# Altium PCB PCB1.PcbDoc
Units mm, origin at the board's own origin, x right, y up, seen from the top; angles counter-clockwise.
Board outline 115.32 x 91.31 mm, 2 copper layers (Top Layer, Bottom Layer); 45 components, 42 nets, 387 pads, 45 vias.
Unrouted connection lines stored in the file: 18.
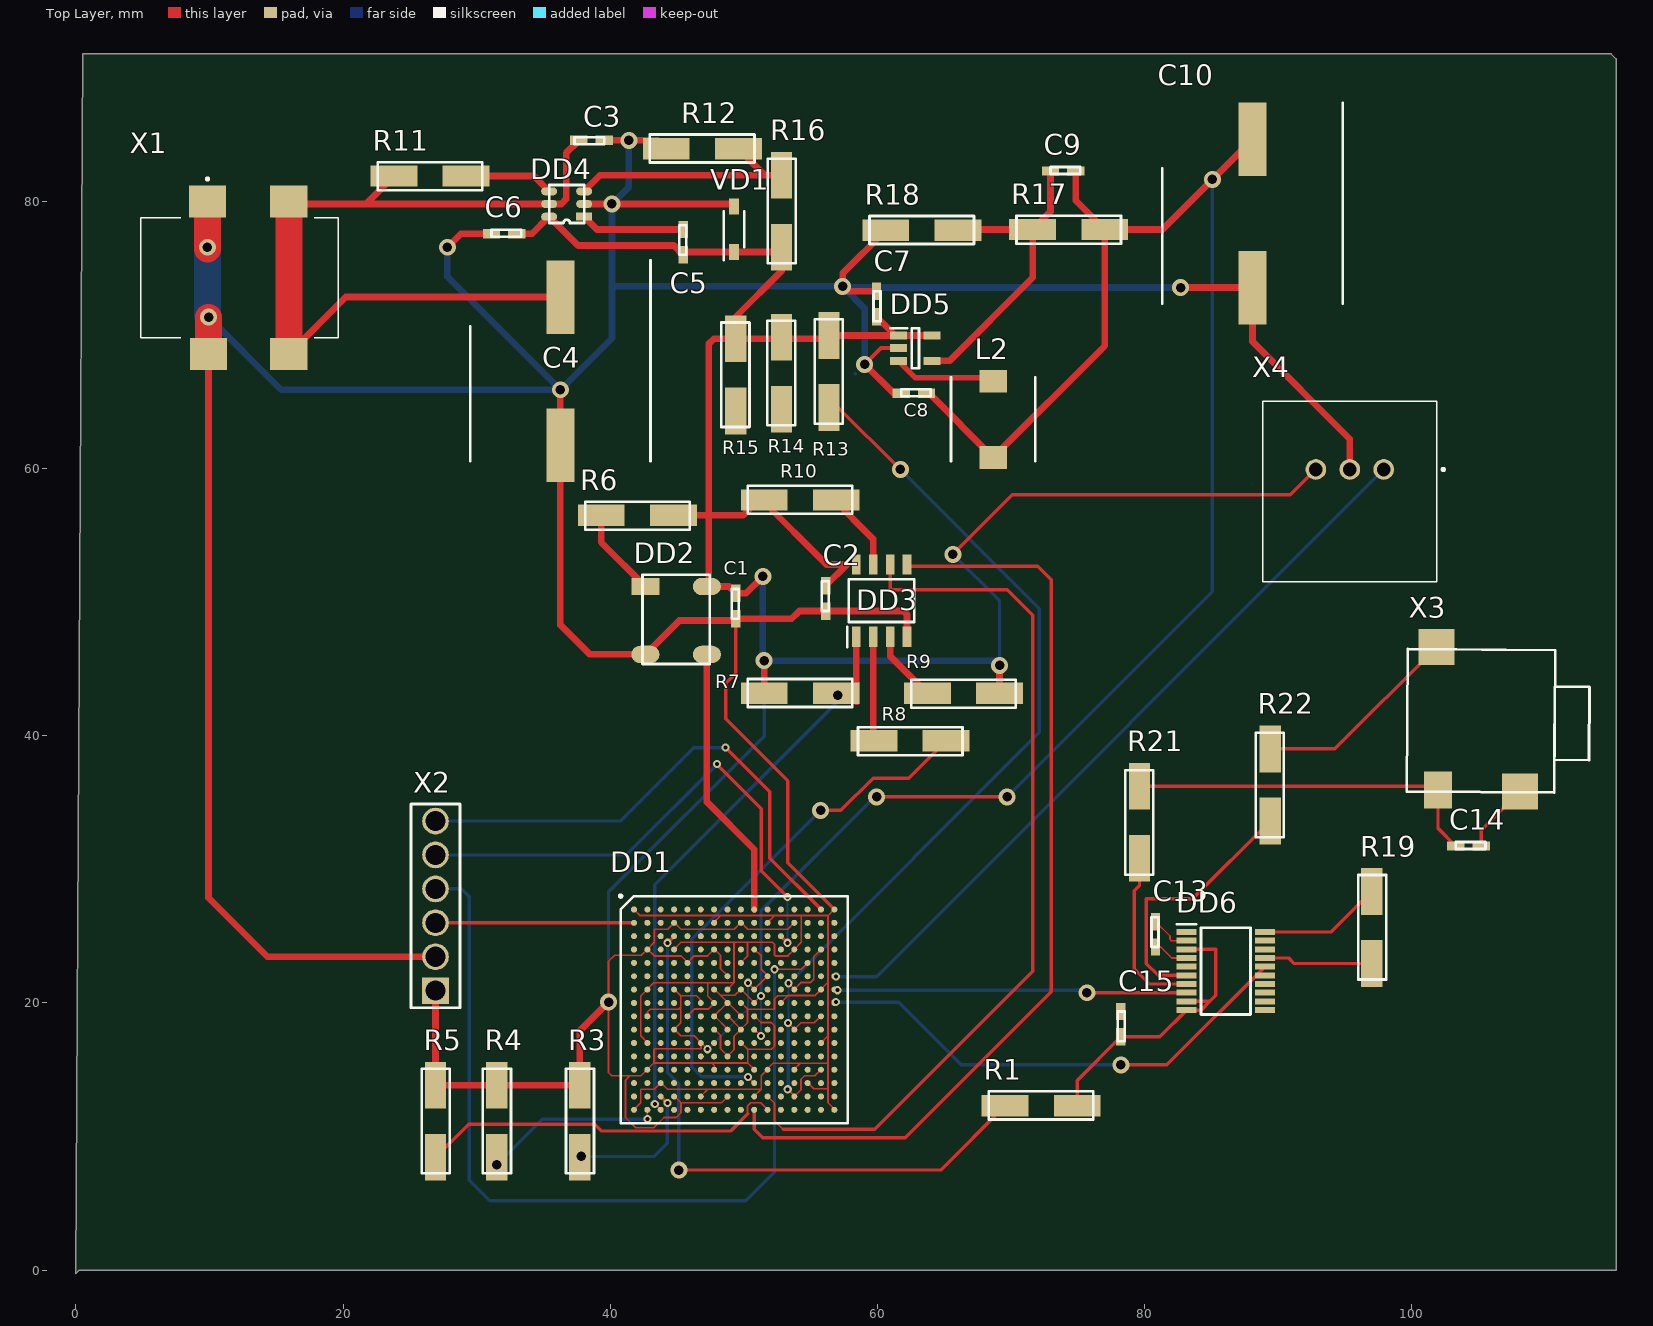
[diagram p0: Top Layer view]
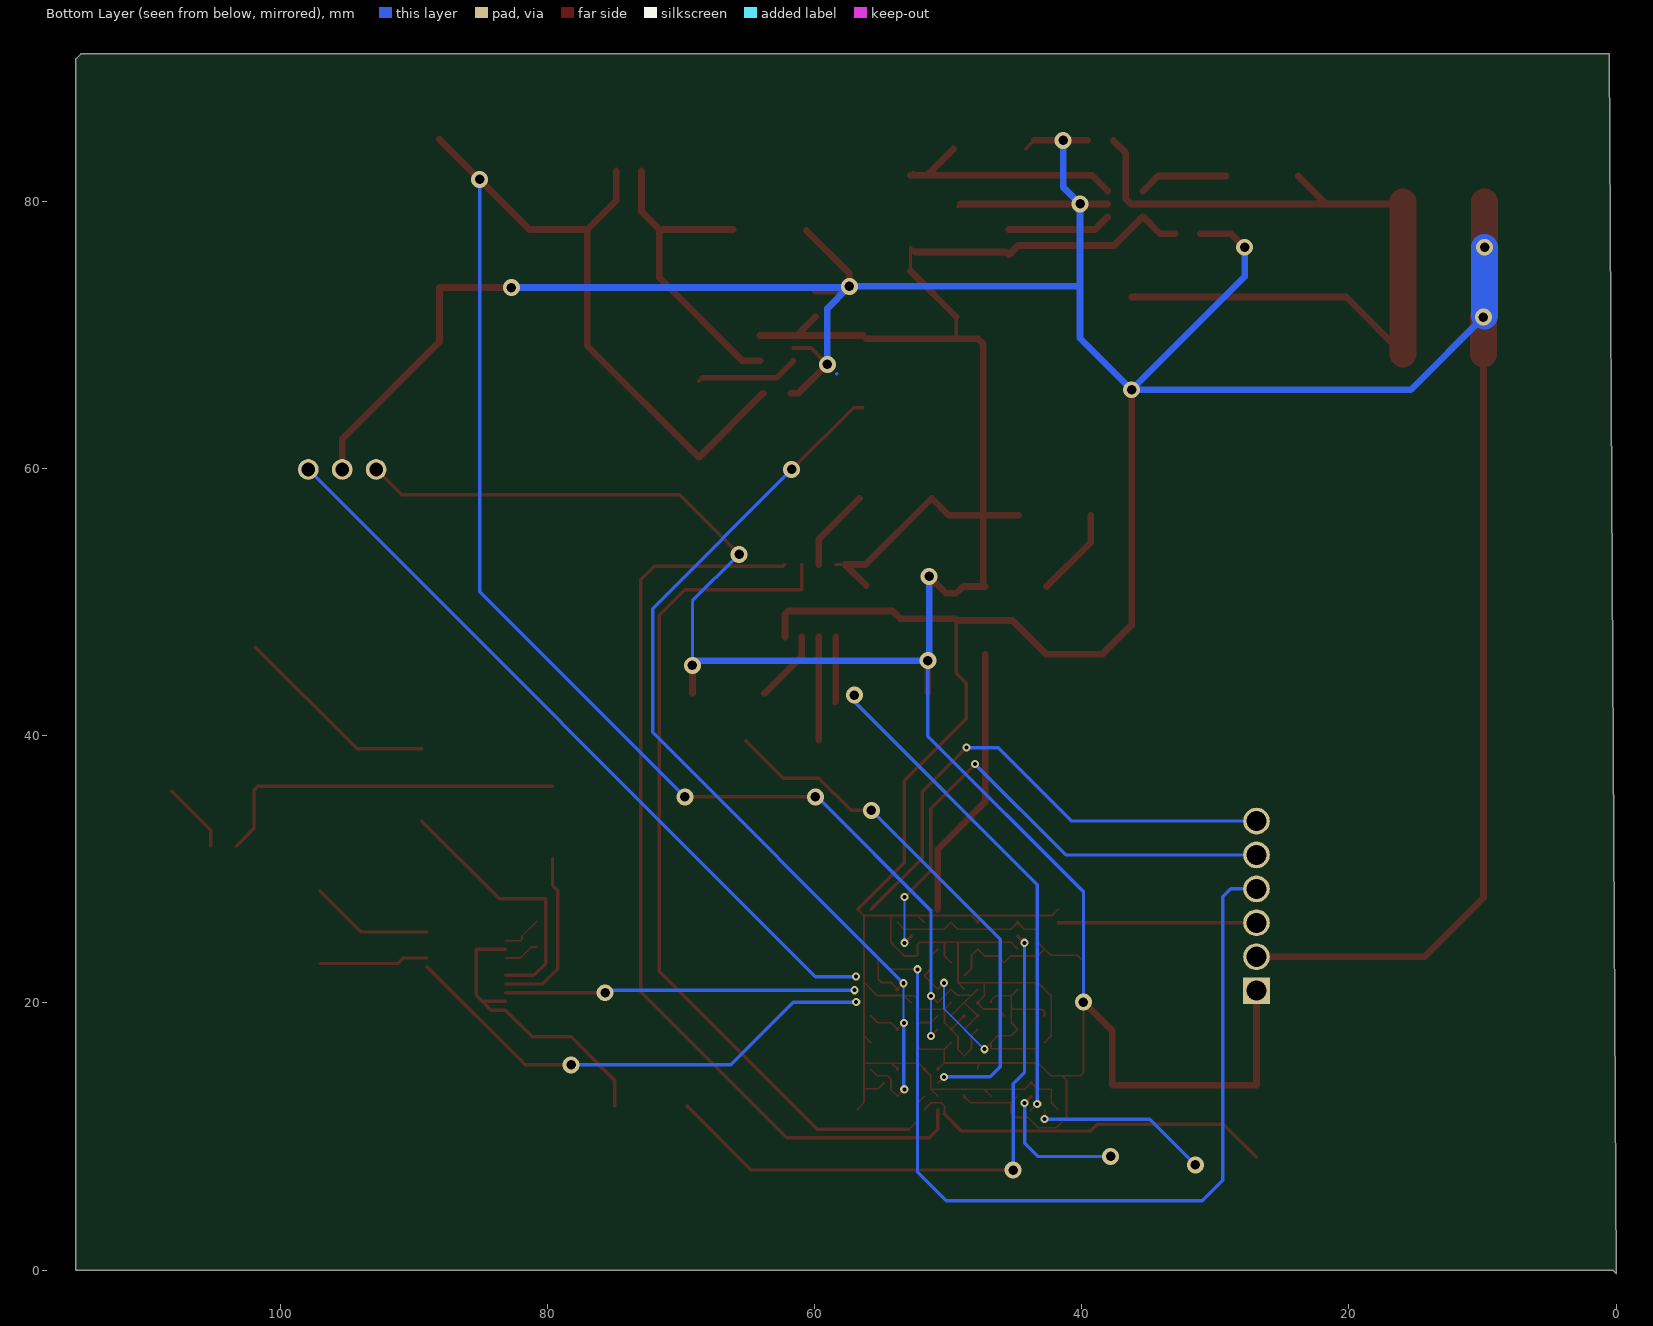
[diagram p1: Bottom Layer view, seen from below]

## Layer stack, top to bottom
Top Solder: solder mask 0.0102, Solder Resist, Dk 3.5
Top Layer: signal copper 0.0356
Dielectric 1: dielectric 0.32, FR-4, Dk 4.8
Bottom Layer: signal copper 0.0356
Bottom Solder: solder mask 0.0102, Solder Resist, Dk 3.5

## Board outline
0.508,91.059 114.935,91.059 115.316,90.678 115.316,0 0.254,0 0,-0.254

## Design rules (kind name [scope] priority, off if disabled: settings)
Clearance [All] p1 off: gap=0.254 ignorepadtopadclearanceinfootprint=FALSE except(0: Arc-Hole Track-Hole SMDPad-Hole THPad-Hole Via-Hole Fill-Hole Poly-Hole Region-Hole Text-Hole)
PolygonConnect [All] p1: connectstyle=Relief reliefconductorwidth=0.254 reliefentries=4 polygonreliefangle="90 Angle" airgapwidth=0.254
RoutingVias [All] p1: holewidth=0.711 width=1.27 viastyle="Through Hole" minholewidth=0.711 minwidth=1.27 maxholewidth=0.711 maxwidth=1.27
SolderMaskExpansion [All] p1: expansion=0.102
Width [All] p1: maxlimit=0.254 minlimit=0.254 preferedwidth=0.254
30 further rules are at their usual default settings.

## Components (designator, comment, footprint, x,y, rotation, side; value= is the part's Value field where it differs from the comment)
C1 "Capacitor" SMD0805 49.403,49.723 r270 top
C2 "Capacitor" SMD0805 56.134,50.292 r270 top
C3 "Capacitor" SMD0805 38.608,84.582 r0 top
C4 "SMD_ElectrolyticCap" ElectrolitycCap 36.322,67.183 r270 top
C5 "Capacitor" SMD0805 45.466,76.962 r270 top
C6 "Capacitor" SMD0805 32.07,77.597 r180 top
C7 "Capacitor" SMD0805 59.944,72.329 r90 top
C8 "Capacitor" SMD0805 62.738,65.659 r180 top
C9 "Capacitor" SMD0805 73.914,82.296 r180 top
C10 "SMD_ElectrolyticCap" ElectrolitycCap 88.138,78.994 r270 top
C13 "Capacitor" SMD0805 80.832,25.146 r270 top
C14 "Capacitor" SMD0805 104.267,31.75 r180 top
C15 "Capacitor" SMD0805 78.232,18.415 r90 top
DD1 "Spartan-6" FTG256 49.312,20.527 r0 top
DD2 "SG-8002JC-50" SOJ4 42.644,51.181 r0 top
DD3 "M25P80" STSO-8 63.118,46.35 r90 top
DD4 "MP2359" SOP6 38.053,78.872 r180 top
DD5 "NCP1529" "PCBComponent_1 - duplicate1" 60.935,70.534 r0 top
DD6 "PCM5102A" PW(R-PDSO-G20) 82.104,18.801 r0 top
L2 "Inductance" InductorSMD 65.276,67.656 r270 top
R1 "SMD_Resistor" Resistor 72.263,12.305 r0 top
R3 "SMD_Resistor" Resistor 37.719,11.143 r270 top
R4 "SMD_Resistor" Resistor 31.496,11.143 r270 top
R5 "SMD_Resistor" Resistor 26.924,11.143 r270 top
R6 "SMD_Resistor" Resistor 42.037,56.515 r180 top
R7 "SMD_Resistor" Resistor 54.229,43.18 r0 top
R8 "SMD_Resistor" Resistor 62.451,39.624 r180 top
R9 "SMD_Resistor" Resistor 66.454,43.18 r180 top
R10 "SMD_Resistor" Resistor 54.229,57.658 r0 top
R11 "SMD_Resistor" Resistor 26.51,81.915 r180 top
R12 "SMD_Resistor" Resistor 46.901,83.947 r0 top
R13 "SMD_Resistor" Resistor 56.388,67.277 r270 top
R14 "SMD_Resistor" Resistor 52.832,67.15 r270 top
R15 "SMD_Resistor" Resistor 49.403,67.023 r270 top
R16 "SMD_Resistor" Resistor 52.832,79.281 r270 top
R17 "SMD_Resistor" Resistor 74.328,77.912 r180 top
R18 "SMD_Resistor" Resistor 63.34,77.851 r0 top
R19 "SMD_Resistor" Resistor 97.028,25.654 r270 top
R21 "SMD_Resistor" Resistor 79.629,33.528 r90 top
R22 "SMD_Resistor" Resistor 89.408,36.322 r90 top
VD1 "1N5819HW" SOD123 50.939,75.367 r90 top
X1 "PowerJack3.5mm" PowerJackConnector4pin 3.835,66.37 r0 top
X2 "6x2.54Connector" 6PINConnector2.54 26.924,20.922 r180 top
X3 "CUI SJ1-3513-SMT-TR" StereoJack3.5 108.131,35.841 r180 top
X4 "TORX1355" SPDIF 87.905,50.46 r0 top

## Footprints (in the part's own frame and the unit in brackets; to place one, negate y for a bottom-side part, rotate by r counter-clockwise, add the part's x,y. Pads: shape width x height; smd on the part's side, far side on the other; paste and mask are expansions set on the pad)
6PINConnector2.54 [mm]
  rect 2x2 hole 1.5: 1(0,0)
  round 2 hole 1.5: 2(0,-2.54) 3(0,-5.08) 4(0,-7.62) 5(0,-10.16) 6(0,-12.7)
  silkscreen extent -1.84,-13.97 1.84,1.27
ElectrolitycCap [mm]
  rect 5.5x2.1 smd: 1(-5.669,-0.046) 2(5.431,-0.046)
  silkscreen extent -8.42,-6.8 6.63,6.7, body extent -7.62,-6.9 7.38,6.8, height 17
FTG256 [mm]
  round 0.45 smd: A1(-7.525,6.475) A2(-6.525,6.475) A3(-5.525,6.475) A4(-4.525,6.475) A5(-3.525,6.475) A6(-2.525,6.475) A7(-1.525,6.475) A8(-0.525,6.475) A9(0.475,6.475) A10(1.475,6.475) A11(2.475,6.475) A12(3.475,6.475) A13(4.475,6.475) A14(5.475,6.475) A15(6.475,6.475) A16(7.475,6.475) B1(-7.525,5.475) B2(-6.525,5.475) B3(-5.525,5.475) B4(-4.525,5.475) B5(-3.525,5.475) B6(-2.525,5.475) B7(-1.525,5.475) B8(-0.525,5.475) B9(0.475,5.475) B10(1.475,5.475) B11(2.475,5.475) B12(3.475,5.475) B13(4.475,5.475) B14(5.475,5.475) B15(6.475,5.475) B16(7.475,5.475) C1(-7.525,4.475) C2(-6.525,4.475) C3(-5.525,4.475) C4(-4.525,4.475) C5(-3.525,4.475) C6(-2.525,4.475) C7(-1.525,4.475) C8(-0.525,4.475) C9(0.475,4.475) C10(1.475,4.475) C11(2.475,4.475) C12(3.475,4.475) C13(4.475,4.475) C14(5.475,4.475) C15(6.475,4.475) C16(7.475,4.475) D1(-7.525,3.475) D2(-6.525,3.475) D3(-5.525,3.475) D4(-4.525,3.475) D5(-3.525,3.475) D6(-2.525,3.475) D7(-1.525,3.475) D8(-0.525,3.475) D9(0.475,3.475) D10(1.475,3.475) D11(2.475,3.475) D12(3.475,3.475) D13(4.475,3.475) D14(5.475,3.475) D15(6.475,3.475) D16(7.475,3.475) E1(-7.525,2.475) E2(-6.525,2.475) E3(-5.525,2.475) E4(-4.525,2.475) E5(-3.525,2.475) E6(-2.525,2.475) E7(-1.525,2.475) E8(-0.525,2.475) E9(0.475,2.475) E10(1.475,2.475) E11(2.475,2.475) E12(3.475,2.475) E13(4.475,2.475) E14(5.475,2.475) E15(6.475,2.475) E16(7.475,2.475) F1(-7.525,1.475) F2(-6.525,1.475) F3(-5.525,1.475) F4(-4.525,1.475) F5(-3.525,1.475) F6(-2.525,1.475) F7(-1.525,1.475) F8(-0.525,1.475) F9(0.475,1.475) F10(1.475,1.475) F11(2.475,1.475) F12(3.475,1.475) F13(4.475,1.475) F14(5.475,1.475) F15(6.475,1.475) F16(7.475,1.475) G1(-7.525,0.475) G2(-6.525,0.475) G3(-5.525,0.475) G4(-4.525,0.475) G5(-3.525,0.475) G6(-2.525,0.475) G7(-1.525,0.475) G8(-0.525,0.475) G9(0.475,0.475) G10(1.475,0.475) G11(2.475,0.475) G12(3.475,0.475) G13(4.475,0.475) G14(5.475,0.475) G15(6.475,0.475) G16(7.475,0.475) H1(-7.525,-0.525) H2(-6.525,-0.525) H3(-5.525,-0.525) H4(-4.525,-0.525) H5(-3.525,-0.525) H6(-2.525,-0.525) H7(-1.525,-0.525) H8(-0.525,-0.525) H9(0.475,-0.525) H10(1.475,-0.525) H11(2.475,-0.525) H12(3.475,-0.525) H13(4.475,-0.525) H14(5.475,-0.525) H15(6.475,-0.525) H16(7.475,-0.525) J1(-7.525,-1.525) J2(-6.525,-1.525) J3(-5.525,-1.525) J4(-4.525,-1.525) J5(-3.525,-1.525) J6(-2.525,-1.525) J7(-1.525,-1.525) J8(-0.525,-1.525) J9(0.475,-1.525) J10(1.475,-1.525) J11(2.475,-1.525) J12(3.475,-1.525) J13(4.475,-1.525) J14(5.475,-1.525) J15(6.475,-1.525) J16(7.475,-1.525) K1(-7.525,-2.525) K2(-6.525,-2.525) K3(-5.525,-2.525) K4(-4.525,-2.525) K5(-3.525,-2.525) K6(-2.525,-2.525) K7(-1.525,-2.525) K8(-0.525,-2.525) K9(0.475,-2.525) K10(1.475,-2.525) K11(2.475,-2.525) K12(3.475,-2.525) K13(4.475,-2.525) K14(5.475,-2.525) K15(6.475,-2.525) K16(7.475,-2.525) L1(-7.525,-3.525) L2(-6.525,-3.525) L3(-5.525,-3.525) L4(-4.525,-3.525) L5(-3.525,-3.525) L6(-2.525,-3.525) L7(-1.525,-3.525) L8(-0.525,-3.525) L9(0.475,-3.525) L10(1.475,-3.525) L11(2.475,-3.525) L12(3.475,-3.525) L13(4.475,-3.525) L14(5.475,-3.525) L15(6.475,-3.525) L16(7.475,-3.525) M1(-7.525,-4.525) M2(-6.525,-4.525) M3(-5.525,-4.525) M4(-4.525,-4.525) M5(-3.525,-4.525) M6(-2.525,-4.525) M7(-1.525,-4.525) M8(-0.525,-4.525) M9(0.475,-4.525) M10(1.475,-4.525) M11(2.475,-4.525) M12(3.475,-4.525) M13(4.475,-4.525) M14(5.475,-4.525) M15(6.475,-4.525) M16(7.475,-4.525) N1(-7.525,-5.525) N2(-6.525,-5.525) N3(-5.525,-5.525) N4(-4.525,-5.525) N5(-3.525,-5.525) N6(-2.525,-5.525) N7(-1.525,-5.525) N8(-0.525,-5.525) N9(0.475,-5.525) N10(1.475,-5.525) N11(2.475,-5.525) N12(3.475,-5.525) N13(4.475,-5.525) N14(5.475,-5.525) N15(6.475,-5.525) N16(7.475,-5.525) P1(-7.525,-6.525) P2(-6.525,-6.525) P3(-5.525,-6.525) P4(-4.525,-6.525) P5(-3.525,-6.525) P6(-2.525,-6.525) P7(-1.525,-6.525) P8(-0.525,-6.525) P9(0.475,-6.525) P10(1.475,-6.525) P11(2.475,-6.525) P12(3.475,-6.525) P13(4.475,-6.525) P14(5.475,-6.525) P15(6.475,-6.525) P16(7.475,-6.525) R1(-7.525,-7.525) R2(-6.525,-7.525) R3(-5.525,-7.525) R4(-4.525,-7.525) R5(-3.525,-7.525) R6(-2.525,-7.525) R7(-1.525,-7.525) R8(-0.525,-7.525) R9(0.475,-7.525) R10(1.475,-7.525) R11(2.475,-7.525) R12(3.475,-7.525) R13(4.475,-7.525) R14(5.475,-7.525) R15(6.475,-7.525) R16(7.475,-7.525) T1(-7.525,-8.525) T2(-6.525,-8.525) T3(-5.525,-8.525) T4(-4.525,-8.525) T5(-3.525,-8.525) T6(-2.525,-8.525) T7(-1.525,-8.525) T8(-0.525,-8.525) T9(0.475,-8.525) T10(1.475,-8.525) T11(2.475,-8.525) T12(3.475,-8.525) T13(4.475,-8.525) T14(5.475,-8.525) T15(6.475,-8.525) T16(7.475,-8.525)
  silkscreen extent -8.62,-9.53 8.47,7.57, body extent -8.53,-9.53 8.47,7.47, height 1.55
InductorSMD [mm] "B82462G4472M"
  rect 1.7x2.05 smd: 1(1.108,3.398) 2(6.808,3.398)
  silkscreen extent 0.81,0.25 7.11,6.55, body extent 0.81,0.25 7.11,6.55, height 3
"PCBComponent_1 - duplicate1" [mm]
  rect 1.25x0.6 smd: 1(0.66,-0.557) 2(0.66,-1.507) 3(0.66,-2.457) 4(3.16,-2.457) 5(3.16,-0.557)
  silkscreen extent 0.04,-3.01 2.19,-0.01, body extent 0.54,-3.01 3.29,-0.01, height 1.1
PowerJackConnector4pin [mm]
  rect 2.8x2.4 smd: 1(6.016,13.625) 2(6.096,2.225) 3(12.116,2.225) 4(12.116,13.625)
  round 0.85 on Mech1: 5(6.016,7.925)
  round 0.95 on Mech1: 6(10.516,7.925)
  silkscreen extent 1.02,3.43 15.82,15.42, body extent 1.02,1.27 15.82,14.59, height 11.1
PW(R-PDSO-G20) [mm]
  rect 1.475x0.45 smd: 1(1.047,6.517) 2(1.047,5.867) 3(1.047,5.217) 4(1.047,4.567) 5(1.047,3.917) 6(1.047,3.267) 7(1.047,2.617) 8(1.047,1.967) 9(1.047,1.317) 10(1.047,0.667) 11(6.923,0.667) 12(6.923,1.317) 13(6.923,1.967) 14(6.923,2.617) 15(6.923,3.267) 16(6.923,3.917) 17(6.923,4.567) 18(6.923,5.217) 19(6.923,5.867) 20(6.923,6.517)
  silkscreen extent 0.31,0.34 5.83,7.09, body extent 0.78,0.34 7.19,6.84, height 1.2
Resistor [mm] "SMD2512"
  rect 3.5x1.6 smd: 1(-2.7,0) 2(2.7,0)
  silkscreen extent -3.93,-1.02 3.9,1.07
SMD0805 [mm]
  rect 1.3x0.7 smd: 1(-0.95,0) 2(0.95,0)
  silkscreen extent -1.27,-0.3 0.95,0.23
SOD123 [mm]
  rect 1.2x0.75 smd: 1(0.862,1.663) 2(4.262,1.663)
  silkscreen extent 0.26,0.89 3.91,2.44, body extent 0.71,0.89 4.41,2.44, height 1.45
SOJ4 [mm]
  rect 2.1x1.3 smd: 1(0,0)
  oval 2.1x1.3 smd: 2(0,-5.08) 3(4.6,-5.08) 4(4.6,0)
  silkscreen extent -0.23,-5.8 4.82,0.87
SOP6 [mm]
  rect 1.2x0.6 smd: 1(0,0)
  oval 1.2x0.6 smd: 2(0,-0.95) 3(0,-1.9) 4(2.62,-1.9) 5(2.62,-0.95) 6(2.62,0)
  silkscreen extent 0,-2.38 2.62,0.48
SPDIF [mm]
  round 1.545 hole 1.03: 1(10.012,9.484) 2(7.472,9.484) 3(4.932,9.484)
  silkscreen extent 0.97,1.08 14.57,14.58, body extent 0.97,1.08 13.97,14.58, height 8
StereoJack3.5 [mm]
  rect 2.7x2.7 smd: 1(0,0) 2(6.25,-10.8)
  rect 2.1x2.75 smd: 3(6.15,-0.1)
  silkscreen extent -5.2,-10.66 8.5,0.09
STSO-8 [mm]
  rect 1.525x0.65 smd: 1(1.058,4.698) 2(1.058,3.428) 3(1.058,2.158) 4(1.058,0.888) 5(6.482,0.888) 6(6.482,2.158) 7(6.482,3.428) 8(6.482,4.698)
  silkscreen extent 0.29,0.34 5.37,5.37, body extent 0.77,0.34 6.77,5.24, height 1.75

## Part data
C1 C2 C3 C5 C6 C7 C8 C9 C13 C14 C15: library part SMD_Cap, "C1825C104JBGACTU - Kemet"
C4 C10: "EEV-EB2W4R7SQ"
DD1: library part XC6SLX16-2FTG256C
DD2: "Oscillator 50 MHz 3.3V smd"
DD3: "Flash memory SPI"
DD4: "step-down switch converter TSOT-23-6"
DD5: "Step-down / Converter TSOP?5"
DD6: "I2S DAC"
R1 R3 R4 R5 R6 R7 R8 R9 R10 R11 R12 R13 R14 R15 R16 R17 R18 R19 R21 R22: "SMD resistor"
VD1: "Didode Schottky"
X2: "JTAG connect on PCB"
X3: "Stereo Jack 3.5 CUI SJ1-3513-SMT-TR"

## Via types
v1: diameter 1.27, hole 0.711, Top Layer to Bottom Layer, 25 vias
v2: diameter 0.61, hole 0.3, Top Layer to Bottom Layer, 19 vias
v3: diameter 0.6, hole 0.3, Top Layer to Bottom Layer, 1 vias

## Nets (pads, with @x,y where several pads share a name; then routed paths per layer and width w, separated by ;. In a path a pad name is that pad's centre, name@x,y a point inside that pad or via, vN(x,y) a via of type N, cw(c..) or ccw(c..) an arc to the next point about the centre after c; other vN are vias at no path point)
1V2: C8.1 C9.1 C10.1 DD1.G7 DD1.G9 DD1.H8 DD1.H10 DD1.J7 DD1.J9 DD1.K8 DD1.K10 L2.2 R17.1 | length 140.6
  Top Layer w0.13: DD1.G7@47.799,21.034 48.259,20.574 ; DD1.K8@48.799,18.034 47.809,19.024 47.799,19.034 DD1.H8@48.799,20.034 ; DD1.J9@49.799,19.034 DD1.H8@48.799,20.034 ; DD1.K10@50.799,18.034 v2(51.294,17.539) ; v2(51.294,20.529) 50.799,20.034 49.799,21.034 49.339,20.574 48.259,20.574 ; 48.259,20.574 DD1.H8@48.799,20.034
  Top Layer w0.254: v1(59.944,35.433) v1(69.723,35.433) ; C8.1 C8.1@63.863,65.659
  Top Layer w0.5: C8.1@63.863,65.659 L2.2 77.028,69.202 R17.1 ; C9.1 74.864,80.076 R17.1 ; C10.1 81.341,77.912 R17.1
  Bottom Layer w0.13: v2(51.294,17.539) v2(51.294,20.529)
  Bottom Layer w0.254: v2(51.294,20.529) 51.294,26.91 v1@59.817,35.433 ; v1(69.723,35.433) 85.09,50.8 v1(85.09,81.661)
3V3: C1.1 C2.1 C5.2 C6.1 C7.1 DD1.B4 DD1.B9 DD1.B13 DD1.D2 DD1.D7 DD1.D10 DD1.E5 DD1.F8 DD1.F11 DD1.G4 DD1.G10 DD1.H6 DD1.J2 DD1.J10 DD1.K4 DD1.L6 DD1.L9 DD1.N2 DD1.N7 DD1.N10 DD1.R4 DD1.R8 DD2.4 DD3.8 DD4.6 DD5.1 DD5.5 DD6.1 DD6.8 DD6.20 R3.1 R4.1 R5.1 R6.1 R7.1 R9.1 R10.1 R13.1 R14.1 R15.1 R16.2 R19.1 VD1.1 X2.1 X4.3 | length 342.6
  Top Layer w0.13: DD1.J2@42.799,19.034 42.799,19.333 43.007,19.541 45.146,19.541 45.29,19.685 ; DD1.R4@44.799,13.034 45.308,12.525 ; DD1.G4@44.799,21.034 45.29,20.543 ; DD1.B4@44.799,26.003 44.323,25.527 43.307,25.527 43.307,24.542 DD1.D2@42.799,24.034 ; DD1.B4@44.799,26.034 45.306,25.527 49.292,25.527 49.799,26.034 50.306,25.527 53.292,25.527 DD1.B13@53.799,26.034 ; DD1.H6@46.799,20.034 46.799,20.209 46.465,20.543 45.29,20.543 ; v2(47.294,16.539) DD1.L6@46.799,17.034 ; DD1.N7@47.799,15.034 47.799,15.32 47.608,15.511 ; DD1.R8@48.799,12.985 48.339,12.525 45.308,12.525 ; DD1.F8@48.799,22.034 48.26,22.573 48.26,23.573 47.799,24.034 47.292,23.527 46.292,23.527 45.799,23.034 45.306,23.527 43.306,23.527 DD1.D2@42.799,24.034 ; DD1.L9@49.799,17.034 50.306,16.527 ; v2(50.322,21.511) 50.799,21.034 51.799,22.034 51.308,22.525 51.308,23.525 DD1.D10@50.799,24.034 ; DD1.N10@50.783,15.034 50.306,15.511 ; DD1.J10@50.799,19.034 51.291,18.542 52.07,18.542 52.308,18.304 52.308,16.764 52.071,16.527 50.306,16.527 ; 41.467,14.543 40.132,14.543 39.878,14.797 v1(39.878,20.066) 39.878,23.114 40.337,23.573 42.338,23.573 DD1.D2@42.799,24.034 ; 41.467,14.543 41.148,14.224 41.148,11.43 41.91,10.668 43.274,10.668 44.036,11.43 44.958,11.43 45.308,11.78 45.308,12.525 ; 41.467,14.543 42.308,14.543 43.276,15.511 ; 43.276,15.511 47.608,15.511 ; 43.276,15.511 43.276,16.511 43.338,16.573 46.799,16.573 DD1.L6@46.799,17.034 ; 45.29,19.685 45.29,20.543 ; 45.29,19.685 45.29,18.525 44.799,18.034 45.29,17.543 46.29,17.543 DD1.L6@46.799,17.034 ; 47.608,15.511 50.306,15.511 ; 50.306,15.511 50.306,16.527
  Top Layer w0.254: DD1.B4@44.799,26.003 DD1.B4@44.799,26.034 ; C5.2 C5.2@45.683,76.229 ; DD2.4 DD2.4@47.371,51.308 ; DD1.R8@48.799,12.985 DD1.R8@48.799,13.034 ; R15.1 R15.1@49.403,71.374 ; DD1.N10@50.783,15.034 DD1.N10@50.799,15.034 ; R16.2@52.48,76.229 R16.2 52.832,74.803 ; R13.1@56.134,69.723 R13.1 ; 57.724,52.832 DD3.8 ; DD5.1@61.346,69.977 DD5.1 ; v1(65.659,53.594) 70.104,58.039 90.932,58.039 X4.3 ; v1(75.692,20.768) DD6.8 ; DD6.20 93.992,25.318 R19.1
  Top Layer w0.5: X2.1 R5.1 R4.1 R3.1 37.719,17.907 v1(39.878,20.066) ; C6.1 34.158,77.597 DD4.6 37.597,76.708 44.77,76.708 C5.2 ; R6.1 47.371,56.515 ; C5.2@45.683,76.229 VD1.1 R16.2@52.48,76.229 ; DD2.4 48.895,51.181 C1.1 50.165,50.673 v1(51.435,51.943) ; DD2.4@47.371,51.308 47.371,56.515 ; R15.1@49.403,71.374 52.832,74.803 ; R7.1 v1(51.529,45.626) ; C2.1 57.724,52.832 56.195,52.832 51.242,57.785 49.972,56.515 47.371,56.515 ; R13.1@56.134,69.723 R15.1 47.752,69.723 47.371,69.342 47.371,56.515 ; R13.1 61.346,69.977 C7.1 ; DD5.1 DD5.5 ; R9.1 v1(69.154,45.273)
  Bottom Layer w0.13: v2(47.294,16.539) 50.322,19.567 v2(50.322,21.511)
  Bottom Layer w0.254: v1(39.878,20.066) 39.878,28.321 51.529,39.972 v1(51.529,45.626) v1@51.435,45.72 ; v2(57.023,20.955) 75.505,20.955 v1(75.692,20.768) ; v1(65.659,53.594) 69.154,50.099 v1(69.154,45.273) v1@68.801,45.626
  Bottom Layer w0.5: v1@51.435,45.72 v1(51.435,51.943) ; v1(51.529,45.626) v1@68.801,45.626
GND: C1.2 C2.2 C3.2 C4.2 C6.2 C7.2 C8.2 C10.2 C14.1 C15.1 DD1.A1 DD1.A16 DD1.B7 DD1.B11 DD1.D4 DD1.D13 DD1.E9 DD1.G2 DD1.G8 DD1.G15 DD1.H7 DD1.H9 DD1.H12 DD1.J5 DD1.J8 DD1.K7 DD1.K9 DD1.L2 DD1.L15 DD1.M8 DD1.N11 DD1.N13 DD1.P3 DD1.P14 DD1.R6 DD1.R10 DD1.T1 DD1.T16 DD2.2 DD3.4 DD4.2 DD5.2 DD6.3 DD6.9 DD6.10 DD6.11 DD6.16 DD6.19 R1.2 R12.1 R18.1 VD1.2 X1.1 X1.2 X2.2 X3.1 X4.2 | length 482.1
  Top Layer w0.13: DD1.A1 42.246,26.543 48.26,26.543 ; DD1.T1@41.799,12.034 42.291,12.526 42.291,13.543 43.307,13.543 43.798,14.034 44.29,13.543 47.308,13.543 ; DD1.L2@42.799,17.034 42.291,17.542 42.291,20.526 43.276,21.511 47.306,21.511 ; DD1.D4@44.799,24.034 45.308,24.543 49.276,24.543 ; DD1.J5@45.799,19.034 46.323,19.558 47.371,19.558 DD1.H7@47.799,19.986 ; DD1.R6@46.799,13.034 47.308,13.543 ; DD1.K7@47.799,18.034 48.26,17.573 48.26,16.573 48.799,16.034 49.276,16.511 49.276,17.511 49.799,18.034 DD1.J8@48.799,19.034 ; DD1.H7@47.799,20.034 47.306,20.527 47.306,21.511 ; DD1.B7@47.799,26.082 48.26,26.543 ; DD1.G8@48.799,21.034 49.276,21.511 ; DD1.K9@49.799,18.049 50.292,18.542 50.292,19.541 ; DD1.H9@49.799,20.034 50.292,19.541 ; DD1.E9@49.799,23.034 50.292,23.527 50.292,24.543 ; DD1.R10@50.799,13.034 51.308,13.543 ; DD1.N11@51.799,15.034 51.308,14.543 51.308,13.543 ; DD1.N11@51.799,15.096 52.197,15.494 54.229,15.494 ; DD1.B11@51.799,26.034 52.308,26.543 ; DD1.H12@52.799,20.034 53.292,20.527 ; 53.292,20.555 52.542,20.548 52.308,20.314 52.308,19.541 50.292,19.541 ; 53.32,20.555 55.32,20.555 56.308,21.543 ; DD1.D13 53.31,23.525 52.372,23.525 52.308,23.589 52.308,24.384 52.149,24.543 50.292,24.543 ; DD1.N13@53.799,15.064 54.229,15.494 ; DD1.D13@53.799,24.034 54.308,24.543 54.308,26.543 ; DD1.P14@54.799,14.034 55.244,13.589 56.308,13.589 ; DD1.L15@55.799,17.034 56.308,17.543 ; DD1.A16@56.777,27.012 56.308,26.543 ; DD1.T16@56.799,12.034 56.308,12.525 56.308,13.589 ; 47.306,21.511 49.276,21.511 ; 47.308,13.543 51.308,13.543 ; 48.26,26.543 52.308,26.543 ; 49.276,21.511 49.276,24.543 ; 49.276,24.543 50.292,24.543 ; 52.308,26.543 54.308,26.543 ; 54.229,15.494 56.308,15.494 ; 54.308,26.543 56.308,26.543 ; 56.308,13.589 56.308,15.494 ; 56.308,15.494 56.308,17.543 ; 56.308,17.543 56.308,21.543 ; 56.308,21.543 56.308,26.543
  Top Layer w0.254: R12.1@43.566,84.582 R12.1 ; DD1.H7@47.799,19.986 DD1.H7@47.799,20.034 ; DD1.B7@47.799,26.034 DD1.B7@47.799,26.082 ; VD1.2@49.083,79.822 VD1.2 ; C1.2@49.271,48.641 C1.2 49.403,44.704 48.641,43.942 48.641,41.275 53.292,36.624 53.292,30.497 56.777,27.012 DD1.A16 ; DD1.K9@49.799,18.034 DD1.K9@49.799,18.049 ; DD1.N11@51.799,15.034 DD1.N11@51.799,15.096 ; DD1.N13@53.799,15.034 DD1.N13@53.799,15.064 ; v1(57.404,73.66) v1@57.785,73.279 ; R1.2 74.963,14.196 C15.1 81.148,17.465 DD6.10 84.238,19.468 84.888,20.118 ; v1(78.232,15.367) 81.676,15.367 DD6.16 ; DD6.9 84.888,20.118 ; DD6.3 85.344,24.018 85.344,20.574 84.888,20.118 ; C14.1 105.217,32.927 X3.1
  Top Layer w0.3: v1(59.055,67.818) 60.264,69.027 DD5.2
  Top Layer w0.5: X1.2 9.931,27.882 14.351,23.462 X2.2 ; v1(27.813,76.581) 28.829,77.597 C6.2 ; v1(36.276,65.913) C4.2 36.276,48.306 38.481,46.101 DD2.2 45.184,48.641 C1.2@49.271,48.641 ; DD4.2 v1(40.132,79.822) VD1.2@49.083,79.822 ; C3.2 v1(41.402,84.582) R12.1@43.566,84.582 ; C1.2 53.594,48.773 54.163,49.342 C2.2 61.976,49.342 62.23,49.088 DD3.4 ; v1(57.404,73.66) 57.404,74.615 R18.1 ; v1@57.785,73.279 C7.2 ; v1(59.055,67.818) 61.214,65.659 C8.2 ; v1(82.707,73.563) C10.2 88.092,69.515 95.377,62.23 X4.2
  Top Layer w2: v1@9.851,76.454 v1(9.851,76.581) X1.1 ; X1.2 v1(9.931,71.349)
  Bottom Layer w0.254: v1@9.851,71.429 v1(9.931,71.349) ; v2(56.896,20.066) 61.595,20.066 66.294,15.367 v1(78.232,15.367) ; v1(57.404,73.66) v1@57.501,73.563
  Bottom Layer w0.5: v1(9.931,71.349) 15.367,65.913 v1(36.276,65.913) ; v1(27.813,76.581) 27.813,74.376 v1(36.276,65.913) ; v1(41.402,84.582) 41.402,81.092 v1(40.132,79.822) 40.132,73.66 ; v1(57.404,73.66) 40.132,73.66 ; v1(59.055,67.818) 59.055,72.009 57.501,73.563 v1(82.707,73.563) ; v1(36.276,65.913) 40.132,69.769 40.132,73.66
  Bottom Layer w2: v1@9.851,71.429 v1(9.851,76.581)
NetC3_1: C3.1 C4.1 DD4.5 R11.2 X1.3 X1.4 | length 62.5
  Top Layer w0.254: 21.463,79.822 21.717,79.822
  Top Layer w0.5: X1.3 20.208,72.852 C4.1 ; X1.4 16.124,79.822 23.749,79.822 DD4.5 36.337,79.822 36.703,80.188 36.703,81.468 36.703,83.627 C3.1 ; 21.717,79.822 R11.2
  Top Layer w2: X1.3 X1.4
NetC5_1: C5.1 DD4.1 | length 7.8
  Top Layer w0.5: DD4.1 39.013,77.912 C5.1
NetC9_2: C9.2 DD5.4 R17.2 R18.2 | length 24.3
  Top Layer w0.254: R18.2 R18.2@66.101,77.912
  Top Layer w0.5: DD5.4 65.41,68.077 71.628,74.295 R17.2 ; R18.2@66.101,77.912 R17.2 ; C9.2 72.964,79.248 R17.2
NetC11_2: DD6.18
NetC12_2: DD6.5
NetC13_1: C13.1 DD6.2 | length 3.1
  Top Layer w0.13: C13.1 81.915,25.013 81.915,24.765 82.012,24.668 DD6.2
NetC13_2: C13.2 DD6.4 | length 2.7
  Top Layer w0.13: C13.2 81.214,24.196 82.042,23.368 DD6.4
NetC14_2: C14.2 R21.2 X3.3 | length 27.2
  Top Layer w0.254: R21.2 101.694,36.228 X3.3 101.981,33.086 C14.2
NetC15_2: C15.2 R22.2 X3.2 | length 15.6
  Top Layer w0.254: R22.2 94.262,39.022 X3.2
NetDD1_A4: DD1.A4 X4.1 | length 56.7
  Bottom Layer w0.254: v3(56.896,21.971) 59.944,21.971 X4.1
NetDD1_A10: DD1.A10 DD2.3 | length 20.6
  Top Layer w0.5: DD2.3 47.244,35.035 50.787,31.492 DD1.A10
NetDD1_A15: DD1.A15 X2.6 | length 39.1
  Top Layer w0.254: v2(48.641,39.116) 51.943,35.814 51.943,30.846 DD1.A15
  Bottom Layer w0.254: X2.6 40.767,33.622 46.261,39.116 v2(48.641,39.116)
NetDD1_B16: DD1.B16 DD6.15
NetDD1_C4: DD1.C4 R1.1 | length 44.5
  Top Layer w0.254: v2@44.282,24.507 v2(44.292,24.507) DD1.C4 ; v1(45.146,7.493) 64.751,7.493 R1.1
  Bottom Layer w0.254: v2(44.292,24.507) 44.292,14.824 45.146,13.97 v1(45.146,7.493)
NetDD1_C12: DD1.C12 X2.5 | length 40.1
  Top Layer w0.254: v2@48.006,37.846 51.308,34.544 51.308,29.904 v2(53.282,27.93) ; DD1.C12 v2(53.282,24.507)
  Bottom Layer w0.13: v2(53.282,24.507) v2(53.282,27.93)
  Bottom Layer w0.254: X2.5 41.194,31.082 v2(48.006,37.894)
NetDD1_C14: DD1.C14 X2.3 | length 14.9
  Top Layer w0.254: X2.3 41.787,26.002
NetDD1_D14: DD1.D14 DD6.12
NetDD1_E14: DD1.E14 X2.4 | length 66.2
  Top Layer w0.13: v2(52.308,22.525) 54.31,22.525 DD1.E14
  Bottom Layer w0.254: X2.4 28.862,28.542 29.464,27.94 29.464,6.731 30.988,5.207 50.165,5.207 52.308,7.35 v2(52.308,22.525)
NetDD1_F12: DD1.F12 DD6.14
NetDD1_G11: DD1.G11 DD6.13
NetDD1_P10: DD1.P10 R8.1 | length 39.9
  Top Layer w0.13: v2(50.322,14.467) DD1.P10
  Top Layer w0.254: v1(55.753,34.417) 57.277,34.417 59.69,36.83 62.357,36.83 R8.1
  Bottom Layer w0.254: v2(50.322,14.467) 46.874,14.467 46.101,15.24 46.101,24.765 v1(55.753,34.417)
NetDD1_P13: DD1.P13
NetDD1_R3: DD1.R3 R3.2 | length 10.6
  Top Layer w0.254: DD1.R3 v2(44.282,12.507)
  Bottom Layer w0.254: v1(37.846,8.509) 43.307,8.509 44.282,9.484 v2(44.282,12.507)
NetDD1_R11: DD1.R11 DD3.6 | length 66.5
  Top Layer w0.13: DD1.R11 52.308,12.481 52.308,11.176 52.943,10.541
  Top Layer w0.254: 52.943,10.541 59.804,10.541 71.628,22.365 71.628,49.022 69.723,50.927 60.96,50.927 DD3.6
NetDD1_T2: DD1.T2 R4.2 | length 13.4
  Top Layer w0.13: v2(42.787,11.303) DD1.T2
  Bottom Layer w0.254: v1(31.496,7.874) 34.925,11.303 v2(42.787,11.303)
NetDD1_T3: DD1.T3 DD3.1 R7.2 | length 42
  Top Layer w0.13: v2(43.34,12.448) DD1.T3 DD1.T3@43.838,11.951
  Top Layer w0.254: R7.2@58.42,42.578 R7.2@58.547,42.451
  Top Layer w0.5: R7.2@58.42,42.578 DD3.1
  Bottom Layer w0.254: v2(43.34,12.448) 43.34,28.862 57.023,42.545 v1(57.023,43.053)
NetDD1_T10: DD1.T10 DD3.5 | length 70.6
  Top Layer w0.254: DD1.T10 50.787,10.554 51.435,9.906 62.103,9.906 73.025,20.828 73.025,51.689 72.009,52.705 62.357,52.705 DD3.5
NetDD1_T11: DD1.T11 R5.2 | length 27.5
  Top Layer w0.13: 50.292,11.697 50.292,12.305 50.513,12.526 51.263,12.526 DD1.T11
  Top Layer w0.254: R5.2 29.403,10.922 38.862,10.922 39.37,10.414 49.009,10.414 50.292,11.697
NetDD2_1: DD2.1 R6.2 | length 6.7
  Top Layer w0.5: R6.2 39.337,54.488 DD2.1
NetDD3_2: DD3.2 R8.2 | length 7.8
  Top Layer w0.254: R8.2@59.69,39.685 R8.2
  Top Layer w0.5: R8.2@59.69,39.685 DD3.2
NetDD3_3: DD3.3 R9.2 | length 5.4
  Top Layer w0.5: DD3.3 60.96,45.974 R9.2
NetDD3_7: DD3.7 R10.2 | length 6.2
  Top Layer w0.5: R10.2@56.642,57.785 59.69,54.737 DD3.7
NetDD4_3: DD4.3 R12.2 R16.1 | length 18.4
  Top Layer w0.254: R16.1@52.611,82.202 R16.1
  Top Layer w0.5: DD4.3 39.262,81.981 51.567,81.981 ; R12.2 51.567,81.981 ; R16.1 51.567,81.981
NetDD4_4: DD4.4 R11.1 | length 6.7
  Top Layer w0.5: R11.1 34.29,81.915 DD4.4
NetDD5_3: DD5.3 L2.1 | length 7.7
  Top Layer w0.254: L2.1@68.42,66.802 L2.1
  Top Layer w0.4: DD5.3 62.87,66.802 L2.1@68.42,66.802
NetDD6_6: DD6.6 R22.1 | length 19.9
  Top Layer w0.254: DD6.6 81.023,22.068 80.137,22.954 80.137,27.813 83.599,27.813 R22.1
NetDD6_7: DD6.7 R21.1 | length 12.8
  Top Layer w0.254: R21.1 79.629,28.776 79.248,28.395 79.248,22.576 80.406,21.418 DD6.7
NetDD6_17: DD6.17 R19.2 | length 8.2
  Top Layer w0.254: DD6.17 90.805,23.368 91.219,22.954 R19.2
VCCO_1: DD1.D15 DD1.G13 DD1.J15 DD1.K13 DD1.N15 DD1.R13 R13.2 R14.2 R15.2 | length 77.6
  Top Layer w0.13: v2(53.292,13.541) DD1.R13@53.787,13.046 ; v2(53.32,18.513) 53.799,18.034 54.29,18.525 55.29,18.525 DD1.J15@55.799,19.034 ; v2(53.355,21.478) 53.799,21.034 54.308,21.543 55.023,21.543 55.245,21.765 55.245,23.48 DD1.D15@55.799,24.034 ; DD1.R13 54.29,13.505 54.29,14.285 54.548,14.543 55.328,14.543 DD1.N15
  Top Layer w0.254: DD1.K13@53.799,18.034 DD1.K13@53.815,18.018 ; DD1.G13@53.799,21.034 DD1.G13@53.85,20.983 ; R13.2 57.089,64.577 v1@61.595,60.071
  Bottom Layer w0.13: v2@53.355,18.548 v2(53.355,21.478)
  Bottom Layer w0.254: v2(53.292,13.541) 53.32,13.569 v2(53.32,18.513) v2@53.355,18.548 ; v2(53.355,21.478) 72.136,40.259 72.136,49.53 v1(61.722,59.944)
pads on no net: DD1.A2 DD1.A3 DD1.A5 DD1.A6 DD1.A7 DD1.A8 DD1.A9 DD1.A11 DD1.A12 DD1.A13 DD1.A14 DD1.B1 DD1.B2 DD1.B3 DD1.B5 DD1.B6 DD1.B8 DD1.B10 DD1.B12 DD1.B14 DD1.B15 DD1.C1 DD1.C2 DD1.C3 DD1.C5 DD1.C6 DD1.C7 DD1.C8 DD1.C9 DD1.C10 DD1.C11 DD1.C13 DD1.C15 DD1.C16 DD1.D1 DD1.D3 DD1.D5 DD1.D6 DD1.D8 DD1.D9 DD1.D11 DD1.D12 DD1.D16 DD1.E1 DD1.E2 DD1.E3 DD1.E4 DD1.E6 DD1.E7 DD1.E8 DD1.E10 DD1.E11 DD1.E12 DD1.E13 DD1.E15 DD1.E16 DD1.F1 DD1.F2 DD1.F3 DD1.F4 DD1.F5 DD1.F6 DD1.F7 DD1.F9 DD1.F10 DD1.F13 DD1.F14 DD1.F15 DD1.F16 DD1.G1 DD1.G3 DD1.G5 DD1.G6 DD1.G12 DD1.G14 DD1.G16 DD1.H1 DD1.H2 DD1.H3 DD1.H4 DD1.H5 DD1.H11 DD1.H13 DD1.H14 DD1.H15 DD1.H16 DD1.J1 DD1.J3 DD1.J4 DD1.J6 DD1.J11 DD1.J12 DD1.J13 DD1.J14 DD1.J16 DD1.K1 DD1.K2 DD1.K3 DD1.K5 DD1.K6 DD1.K11 DD1.K12 DD1.K14 DD1.K15 DD1.K16 DD1.L1 DD1.L3 DD1.L4 DD1.L5 DD1.L7 DD1.L8 DD1.L10 DD1.L11 DD1.L12 DD1.L13 DD1.L14 DD1.L16 DD1.M1 DD1.M2 DD1.M3 DD1.M4 DD1.M5 DD1.M6 DD1.M7 DD1.M9 DD1.M10 DD1.M11 DD1.M12 DD1.M13 DD1.M14 DD1.M15 DD1.M16 DD1.N1 DD1.N3 DD1.N4 DD1.N5 DD1.N6 DD1.N8 DD1.N9 DD1.N12 DD1.N14 DD1.N16 DD1.P1 DD1.P2 DD1.P4 DD1.P5 DD1.P6 DD1.P7 DD1.P8 DD1.P9 DD1.P11 DD1.P12 DD1.P15 DD1.P16 DD1.R1 DD1.R2 DD1.R5 DD1.R7 DD1.R9 DD1.R12 DD1.R14 DD1.R15 DD1.R16 DD1.T4 DD1.T5 DD1.T6 DD1.T7 DD1.T8 DD1.T9 DD1.T12 DD1.T13 DD1.T14 DD1.T15 X1.5 X1.6